# EAGLE board Board With Letters (EAGLE 7.6.0)
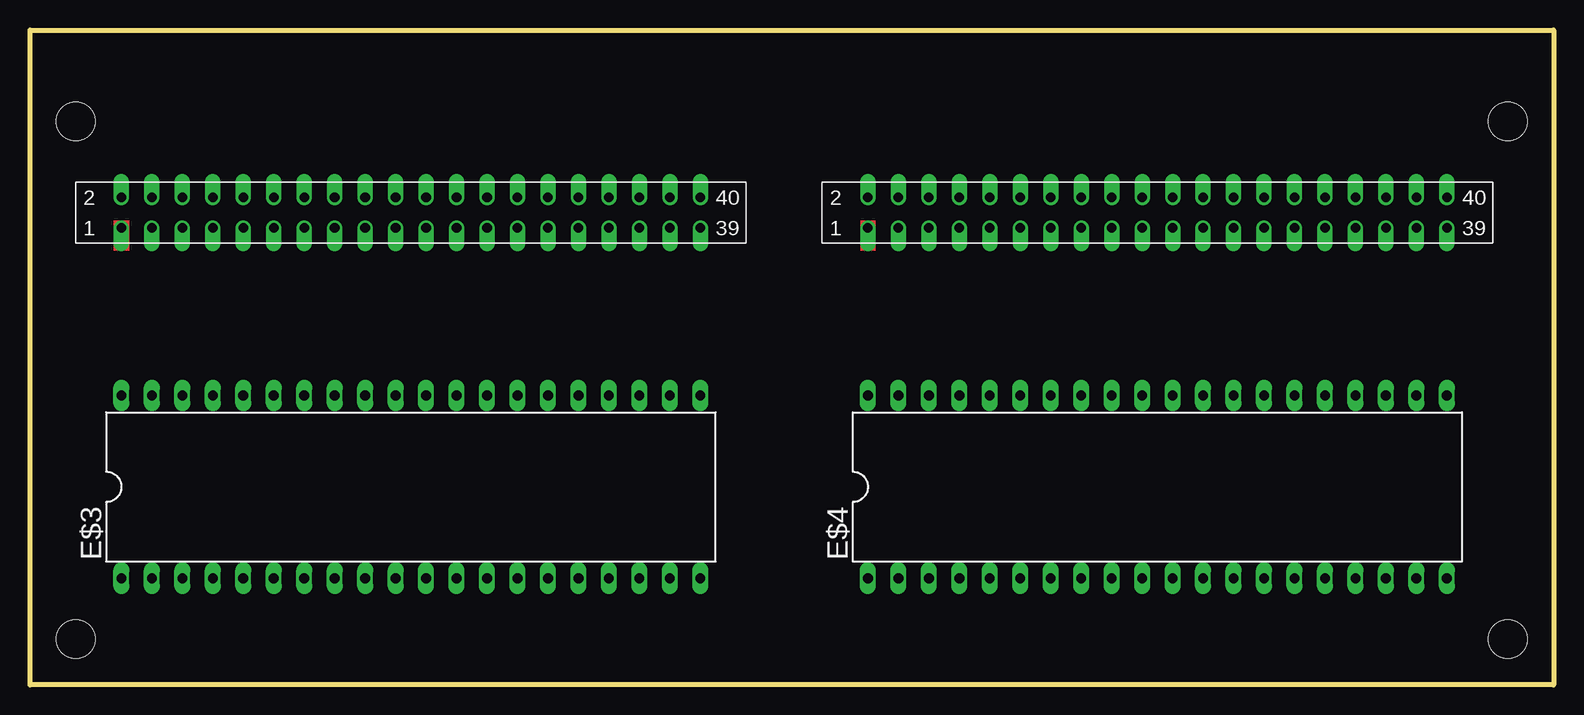
[diagram p0: board, top side]
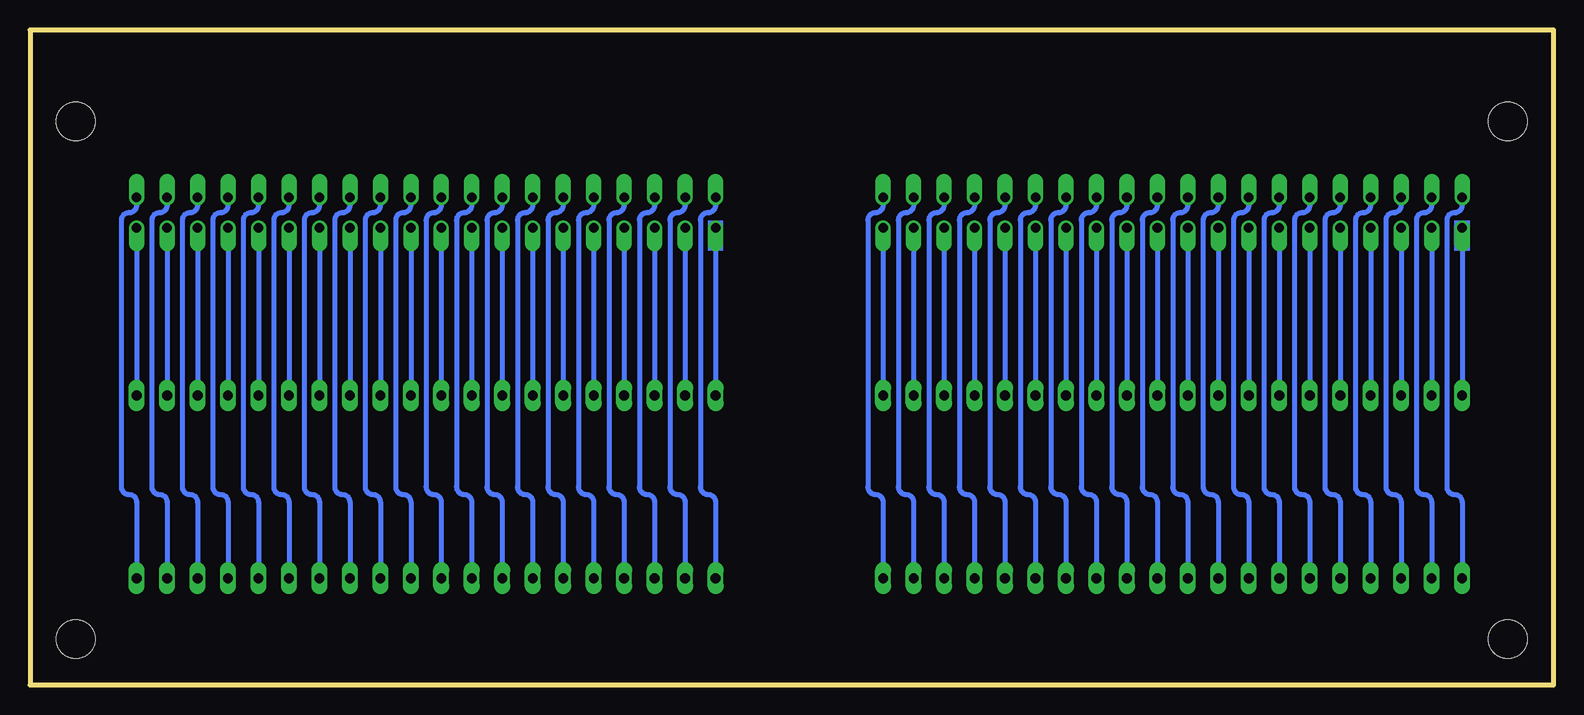
[diagram p1: board, bottom side, seen from below]

Size 127 x 54.61 mm. Coordinates in mm from the lower left corner, seen from the top.
Outline: 0,0 0,54.61 127,54.61 127,0 0,0
Copper layers (1*16): Top 0.035mm / dielectric 1.5mm / Bottom 0.035mm
Design rules "default": minimum track width 10mil, minimum drill 24mil, track to track 8mil, track to pad 8mil, pad to pad 8mil, via to via 8mil, smd to smd 8mil, copper to edge 40mil, drill to drill 8mil, minimum pad ring 10mil, minimum via ring 8mil, stop-mask expansion 4mil, vias tented up to drill 0mil, thermal gap 10mil
Holes 3.2 mm at 3.81,3.81 123.19,3.81 123.19,46.99 3.81,46.99

## Footprints (pad centres in the part's own frame; a part is rotated, then mirrored left to right if it is on the bottom)
40PINNER = drill 0.8 offset: P$1 -16.51,-1.27; P$2 -16.51,1.27; P$3 -13.97,-1.27; P$4 -13.97,1.27; P$5 -11.43,-1.27; P$6 -11.43,1.27; P$7 -8.89,-1.27; P$8 -8.89,1.27; P$9 -6.35,-1.27; P$10 -6.35,1.27; P$11 -3.81,-1.27; P$12 -3.81,1.27; P$13 -1.27,-1.27; P$14 -1.27,1.27; P$15 1.27,-1.27; P$16 1.27,1.27; P$17 3.81,-1.27; P$18 3.81,1.27; P$19 6.35,-1.27; P$20 6.35,1.27; P$21 8.89,-1.27; P$22 8.89,1.27; P$23 11.43,-1.27; P$24 11.43,1.27; P$25 13.97,-1.27; P$26 13.97,1.27; P$27 16.51,-1.27; P$28 16.51,1.27; P$29 19.05,-1.27; P$30 19.05,1.27; P$31 21.59,-1.27; P$32 21.59,1.27; P$33 24.13,-1.27; P$34 24.13,1.27; P$35 26.67,-1.27; P$36 26.67,1.27; P$37 29.21,-1.27; P$38 29.21,1.27; P$39 31.75,-1.27; P$40 31.75,1.27
DIL40 = drill 0.813 long: 1 -24.13,-7.62; 2 -21.59,-7.62; 3 -19.05,-7.62; 4 -16.51,-7.62; 5 -13.97,-7.62; 6 -11.43,-7.62; 7 -8.89,-7.62; 8 -6.35,-7.62; 9 -3.81,-7.62; 10 -1.27,-7.62; 11 1.27,-7.62; 12 3.81,-7.62; 13 6.35,-7.62; 14 8.89,-7.62; 15 11.43,-7.62; 16 13.97,-7.62; 17 16.51,-7.62; 18 19.05,-7.62; 19 21.59,-7.62; 20 24.13,-7.62; 21 24.13,7.62; 22 21.59,7.62; 23 19.05,7.62; 24 16.51,7.62; 25 13.97,7.62; 26 11.43,7.62; 27 8.89,7.62; 28 6.35,7.62; 29 3.81,7.62; 30 1.27,7.62; 31 -1.27,7.62; 32 -3.81,7.62; 33 -6.35,7.62; 34 -8.89,7.62; 35 -11.43,7.62; 36 -13.97,7.62; 37 -16.51,7.62; 38 -19.05,7.62; 39 -21.59,7.62; 40 -24.13,7.62

## Placement (x,y rotation side)
E$1  [40PINNER]  24.13,39.37 0 top
E$2  [40PINNER]  86.36,39.37 0 top
E$3  [DIL40]  31.75,16.51 0 top
E$4  [DIL40]  93.98,16.51 0 top

## Library data of the parts
E$1 E$2 = NES
E$3 E$4 = microchip

## Nets
S$1: E$1.P$2 E$3.1
S$21: E$1.P$1 E$3.40
S$22: E$1.P$3 E$3.39
S$23: E$1.P$5 E$3.38
S$24: E$1.P$7 E$3.37
S$25: E$1.P$9 E$3.36
S$26: E$1.P$11 E$3.35
S$27: E$1.P$13 E$3.34
S$28: E$1.P$15 E$3.33
S$29: E$1.P$17 E$3.32
S$30: E$1.P$19 E$3.31
S$31: E$1.P$21 E$3.30
S$32: E$1.P$23 E$3.29
S$33: E$1.P$25 E$3.28
S$34: E$1.P$27 E$3.27
S$35: E$1.P$29 E$3.26
S$36: E$1.P$31 E$3.25
S$37: E$1.P$33 E$3.24
S$38: E$1.P$35 E$3.23
S$39: E$1.P$37 E$3.22
S$40: E$1.P$39 E$3.21
S$41: E$2.P$2 E$4.1
S$61: E$2.P$1 E$4.40
S$62: E$2.P$3 E$4.39
S$63: E$2.P$5 E$4.38
S$64: E$2.P$7 E$4.37
S$65: E$2.P$9 E$4.36
S$66: E$2.P$11 E$4.35
S$67: E$2.P$13 E$4.34
S$68: E$2.P$15 E$4.33
S$69: E$2.P$17 E$4.32
S$70: E$2.P$19 E$4.31
S$71: E$2.P$21 E$4.30
S$72: E$2.P$23 E$4.29
S$73: E$2.P$25 E$4.28
S$74: E$2.P$27 E$4.27
S$75: E$2.P$29 E$4.26
S$76: E$2.P$31 E$4.25
S$77: E$2.P$33 E$4.24
S$78: E$2.P$35 E$4.23
S$79: E$2.P$37 E$4.22
S$80: E$2.P$39 E$4.21

## Tracks (layer width: path | path; a pad name or v marks a point on that pad's centre or on a via)
S$1
  Bottom 0.406: E$1.P$2 7.62,40.01 arc90 8.26,39.37 arc-90 8.89,38.73 8.89,16.51 arc-90 8.26,15.88 arc90 7.62,15.24 E$3.1
S$2
  Bottom 0.406: 10.16,40.64 10.16,40.01 arc90 10.79,39.37 arc-90 11.43,38.73 11.43,16.51 arc-90 10.79,15.88 arc90 10.16,15.24 10.16,8.89
S$3
  Bottom 0.406: 12.7,40.64 12.7,40.01 arc90 13.34,39.37 arc-90 13.97,38.73 13.97,16.51 arc-90 13.34,15.88 arc90 12.7,15.24 12.7,8.89
S$4
  Bottom 0.406: 15.24,40.64 15.24,40.01 arc90 15.88,39.37 arc-90 16.51,38.73 16.51,16.51 arc-90 15.88,15.88 arc90 15.24,15.24 15.24,8.89
S$5
  Bottom 0.406: 17.78,40.64 17.78,40.01 arc90 18.41,39.37 arc-90 19.05,38.73 19.05,16.51 arc-90 18.41,15.88 arc90 17.78,15.24 17.78,8.89
S$6
  Bottom 0.406: 20.32,40.64 20.32,40.01 arc90 20.95,39.37 arc-90 21.59,38.73 21.59,16.51 arc-90 20.95,15.88 arc90 20.32,15.24 20.32,8.89
S$7
  Bottom 0.406: 22.86,40.64 22.86,40.01 arc90 23.5,39.37 arc-90 24.13,38.73 24.13,16.51 arc-90 23.5,15.88 arc90 22.86,15.24 22.86,8.89
S$8
  Bottom 0.406: 25.4,40.64 25.4,40.01 arc90 26.04,39.37 arc-90 26.67,38.73 26.67,16.51 arc-90 26.04,15.88 arc90 25.4,15.24 25.4,8.89
S$9
  Bottom 0.406: 27.94,40.64 27.94,40.01 arc90 28.57,39.37 arc-90 29.21,38.73 29.21,16.51 arc-90 28.57,15.88 arc90 27.94,15.24 27.94,8.89
S$10
  Bottom 0.406: 30.48,40.64 30.48,40.01 arc90 31.11,39.37 arc-90 31.75,38.73 31.75,16.51 arc-90 31.11,15.88 arc90 30.48,15.24 30.48,8.89
S$11
  Bottom 0.406: 33.02,40.64 33.02,40.01 arc90 33.66,39.37 arc-90 34.29,38.73 34.29,16.51 arc-90 33.66,15.88 arc90 33.02,15.24 33.02,8.89
S$12
  Bottom 0.406: 35.56,40.64 35.56,40.01 arc90 36.2,39.37 arc-90 36.83,38.73 36.83,16.51 arc-90 36.2,15.88 arc90 35.56,15.24 35.56,8.89
S$13
  Bottom 0.406: 38.1,40.64 38.1,40.01 arc90 38.73,39.37 arc-90 39.37,38.73 39.37,16.51 arc-90 38.73,15.88 arc90 38.1,15.24 38.1,8.89
S$14
  Bottom 0.406: 40.64,40.64 40.64,40.01 arc90 41.27,39.37 arc-90 41.91,38.73 41.91,16.51 arc-90 41.27,15.88 arc90 40.64,15.24 40.64,8.89
S$15
  Bottom 0.406: 43.18,40.64 43.18,40.01 arc90 43.81,39.37 arc-90 44.45,38.73 44.45,16.51 arc-90 43.81,15.88 arc90 43.18,15.24 43.18,8.89
S$16
  Bottom 0.406: 45.72,40.64 45.72,40.01 arc90 46.35,39.37 arc-90 46.99,38.73 46.99,16.51 arc-90 46.35,15.88 arc90 45.72,15.24 45.72,8.89
S$17
  Bottom 0.406: 48.26,40.64 48.26,40.01 arc90 48.9,39.37 arc-90 49.53,38.73 49.53,16.51 arc-90 48.9,15.88 arc90 48.26,15.24 48.26,8.89
S$18
  Bottom 0.406: 50.8,40.64 50.8,40.01 arc90 51.44,39.37 arc-90 52.07,38.73 52.07,16.51 arc-90 51.44,15.88 arc90 50.8,15.24 50.8,8.89
S$19
  Bottom 0.406: 53.34,40.64 53.34,40.01 arc90 53.98,39.37 arc-90 54.61,38.73 54.61,16.51 arc-90 53.98,15.88 arc90 53.34,15.24 53.34,8.89
S$20
  Bottom 0.406: 55.88,40.64 55.88,40.01 arc90 56.52,39.37 arc-90 57.15,38.73 57.15,16.51 arc-90 56.52,15.88 arc90 55.88,15.24 55.88,8.89
S$21
  Bottom 0.406: E$1.P$1 E$3.40
S$22
  Bottom 0.406: E$1.P$3 E$3.39
S$23
  Bottom 0.406: E$1.P$5 E$3.38
S$24
  Bottom 0.406: E$1.P$7 E$3.37
S$25
  Bottom 0.406: E$1.P$9 E$3.36
S$26
  Bottom 0.406: E$1.P$11 E$3.35
S$27
  Bottom 0.406: E$1.P$13 E$3.34
S$28
  Bottom 0.406: E$1.P$15 E$3.33
S$29
  Bottom 0.406: E$1.P$17 E$3.32
S$30
  Bottom 0.406: E$1.P$19 E$3.31
S$31
  Bottom 0.406: E$1.P$21 E$3.30
S$32
  Bottom 0.406: E$1.P$23 E$3.29
S$33
  Bottom 0.406: E$1.P$25 E$3.28
S$34
  Bottom 0.406: E$1.P$27 E$3.27
S$35
  Bottom 0.406: E$1.P$29 E$3.26
S$36
  Bottom 0.406: E$1.P$31 E$3.25
S$37
  Bottom 0.406: E$1.P$33 E$3.24
S$38
  Bottom 0.406: E$1.P$35 E$3.23
S$39
  Bottom 0.406: E$1.P$37 E$3.22
S$40
  Bottom 0.406: E$1.P$39 E$3.21
S$41
  Bottom 0.406: E$2.P$2 69.85,40.01 arc90 70.48,39.37 arc-90 71.12,38.73 71.12,16.51 arc-90 70.48,15.88 arc90 69.85,15.24 E$4.1
S$42
  Bottom 0.406: 72.39,40.64 72.39,40.01 arc90 73.03,39.37 arc-90 73.66,38.73 73.66,16.51 arc-90 73.03,15.88 arc90 72.39,15.24 72.39,8.89
S$43
  Bottom 0.406: 74.93,40.64 74.93,40.01 arc90 75.56,39.37 arc-90 76.2,38.73 76.2,16.51 arc-90 75.56,15.88 arc90 74.93,15.24 74.93,8.89
S$44
  Bottom 0.406: 77.47,40.64 77.47,40.01 arc90 78.11,39.37 arc-90 78.74,38.73 78.74,16.51 arc-90 78.11,15.88 arc90 77.47,15.24 77.47,8.89
S$45
  Bottom 0.406: 80.01,40.64 80.01,40.01 arc90 80.64,39.37 arc-90 81.28,38.73 81.28,16.51 arc-90 80.64,15.88 arc90 80.01,15.24 80.01,8.89
S$46
  Bottom 0.406: 82.55,40.64 82.55,40.01 arc90 83.19,39.37 arc-90 83.82,38.73 83.82,16.51 arc-90 83.19,15.88 arc90 82.55,15.24 82.55,8.89
S$47
  Bottom 0.406: 85.09,40.64 85.09,40.01 arc90 85.72,39.37 arc-90 86.36,38.73 86.36,16.51 arc-90 85.72,15.88 arc90 85.09,15.24 85.09,8.89
S$48
  Bottom 0.406: 87.63,40.64 87.63,40.01 arc90 88.27,39.37 arc-90 88.9,38.73 88.9,16.51 arc-90 88.27,15.88 arc90 87.63,15.24 87.63,8.89
S$49
  Bottom 0.406: 90.17,40.64 90.17,40.01 arc90 90.81,39.37 arc-90 91.44,38.73 91.44,16.51 arc-90 90.81,15.88 arc90 90.17,15.24 90.17,8.89
S$50
  Bottom 0.406: 92.71,40.64 92.71,40.01 arc90 93.34,39.37 arc-90 93.98,38.73 93.98,16.51 arc-90 93.34,15.88 arc90 92.71,15.24 92.71,8.89
S$51
  Bottom 0.406: 95.25,40.64 95.25,40.01 arc90 95.89,39.37 arc-90 96.52,38.73 96.52,16.51 arc-90 95.89,15.88 arc90 95.25,15.24 95.25,8.89
S$52
  Bottom 0.406: 97.79,40.64 97.79,40.01 arc90 98.42,39.37 arc-90 99.06,38.73 99.06,16.51 arc-90 98.42,15.88 arc90 97.79,15.24 97.79,8.89
S$53
  Bottom 0.406: 100.33,40.64 100.33,40.01 arc90 100.97,39.37 arc-90 101.6,38.73 101.6,16.51 arc-90 100.97,15.88 arc90 100.33,15.24 100.33,8.89
S$54
  Bottom 0.406: 102.87,40.64 102.87,40.01 arc90 103.5,39.37 arc-90 104.14,38.73 104.14,16.51 arc-90 103.5,15.88 arc90 102.87,15.24 102.87,8.89
S$55
  Bottom 0.406: 105.41,40.64 105.41,40.01 arc90 106.05,39.37 arc-90 106.68,38.73 106.68,16.51 arc-90 106.05,15.88 arc90 105.41,15.24 105.41,8.89
S$56
  Bottom 0.406: 107.95,40.64 107.95,40.01 arc90 108.58,39.37 arc-90 109.22,38.73 109.22,16.51 arc-90 108.58,15.88 arc90 107.95,15.24 107.95,8.89
S$57
  Bottom 0.406: 110.49,40.64 110.49,40.01 arc90 111.12,39.37 arc-90 111.76,38.73 111.76,16.51 arc-90 111.12,15.88 arc90 110.49,15.24 110.49,8.89
S$58
  Bottom 0.406: 113.03,40.64 113.03,40.01 arc90 113.67,39.37 arc-90 114.3,38.73 114.3,16.51 arc-90 113.67,15.88 arc90 113.03,15.24 113.03,8.89
S$59
  Bottom 0.406: 115.57,40.64 115.57,40.01 arc90 116.2,39.37 arc-90 116.84,38.73 116.84,16.51 arc-90 116.2,15.88 arc90 115.57,15.24 115.57,8.89
S$60
  Bottom 0.406: 118.11,40.64 118.11,40.01 arc90 118.75,39.37 arc-90 119.38,38.73 119.38,16.51 arc-90 118.75,15.88 arc90 118.11,15.24 118.11,8.89
S$61
  Bottom 0.406: E$2.P$1 E$4.40
S$62
  Bottom 0.406: E$2.P$3 E$4.39
S$63
  Bottom 0.406: E$2.P$5 E$4.38
S$64
  Bottom 0.406: E$2.P$7 E$4.37
S$65
  Bottom 0.406: E$2.P$9 E$4.36
S$66
  Bottom 0.406: E$2.P$11 E$4.35
S$67
  Bottom 0.406: E$2.P$13 E$4.34
S$68
  Bottom 0.406: E$2.P$15 E$4.33
S$69
  Bottom 0.406: E$2.P$17 E$4.32
S$70
  Bottom 0.406: E$2.P$19 E$4.31
S$71
  Bottom 0.406: E$2.P$21 E$4.30
S$72
  Bottom 0.406: E$2.P$23 E$4.29
S$73
  Bottom 0.406: E$2.P$25 E$4.28
S$74
  Bottom 0.406: E$2.P$27 E$4.27
S$75
  Bottom 0.406: E$2.P$29 E$4.26
S$76
  Bottom 0.406: E$2.P$31 E$4.25
S$77
  Bottom 0.406: E$2.P$33 E$4.24
S$78
  Bottom 0.406: E$2.P$35 E$4.23
S$79
  Bottom 0.406: E$2.P$37 E$4.22
S$80
  Bottom 0.406: E$2.P$39 E$4.21

## Text on the board
Holes: NES CPU Conn | NES PPU Conn | Insert CPU Here!! | Insert PPU Here!! | CPU | PPU